# Altium PCB stm32.PcbDoc
Units mm, origin at the board's own origin, x right, y up, seen from the top; angles counter-clockwise.
Board outline 46 x 46 mm, 2 copper layers (Top Layer, Bottom Layer), stack 0.971 mm thick; 38 components, 25 nets, 183 pads, 63 vias.
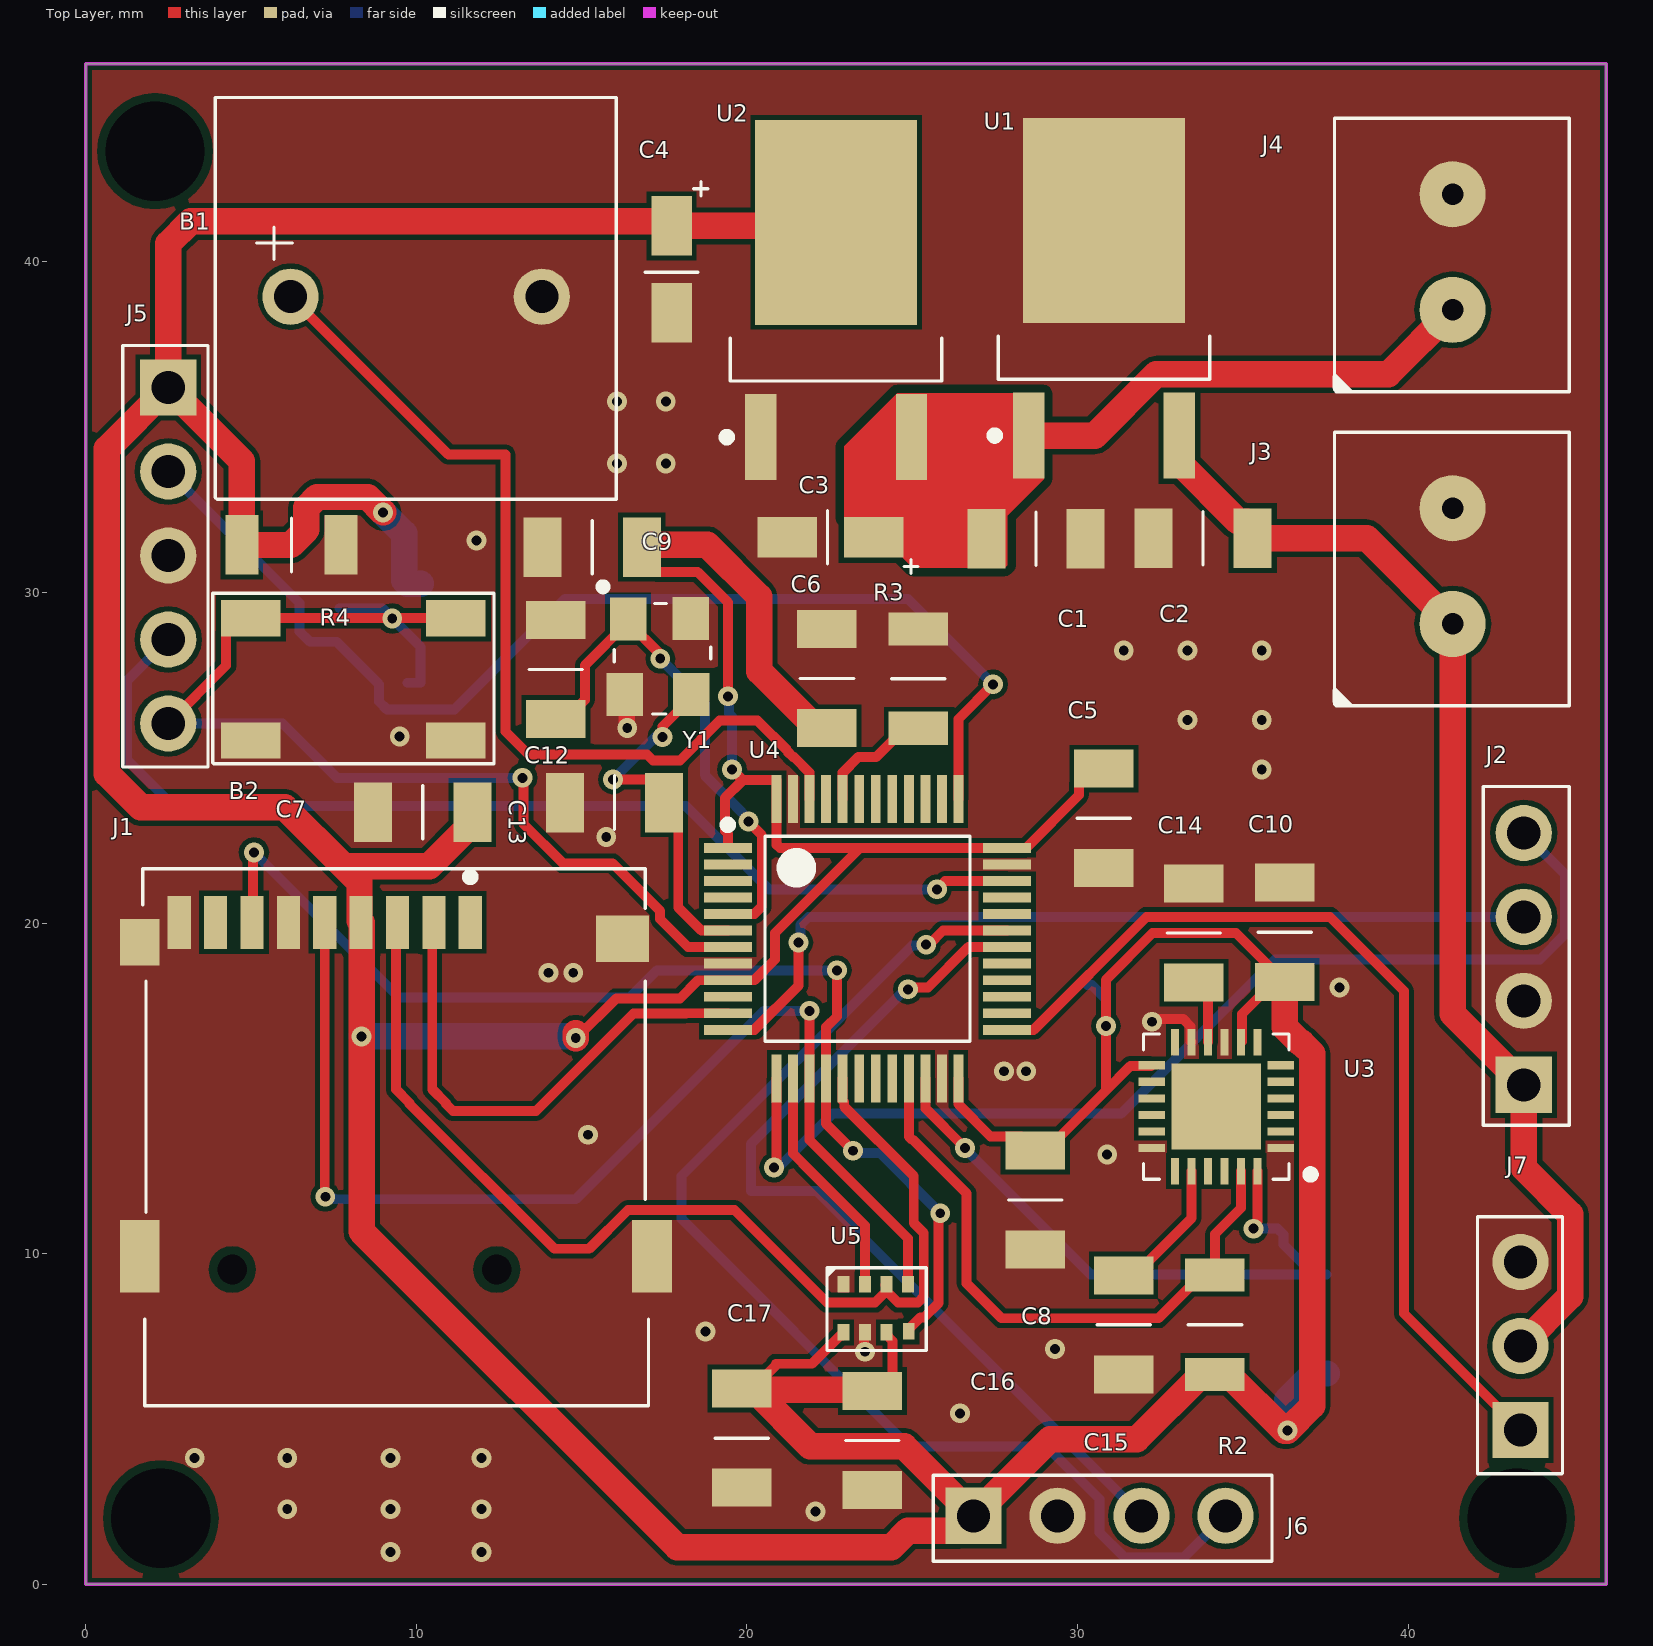
[diagram p0: Top Layer view]
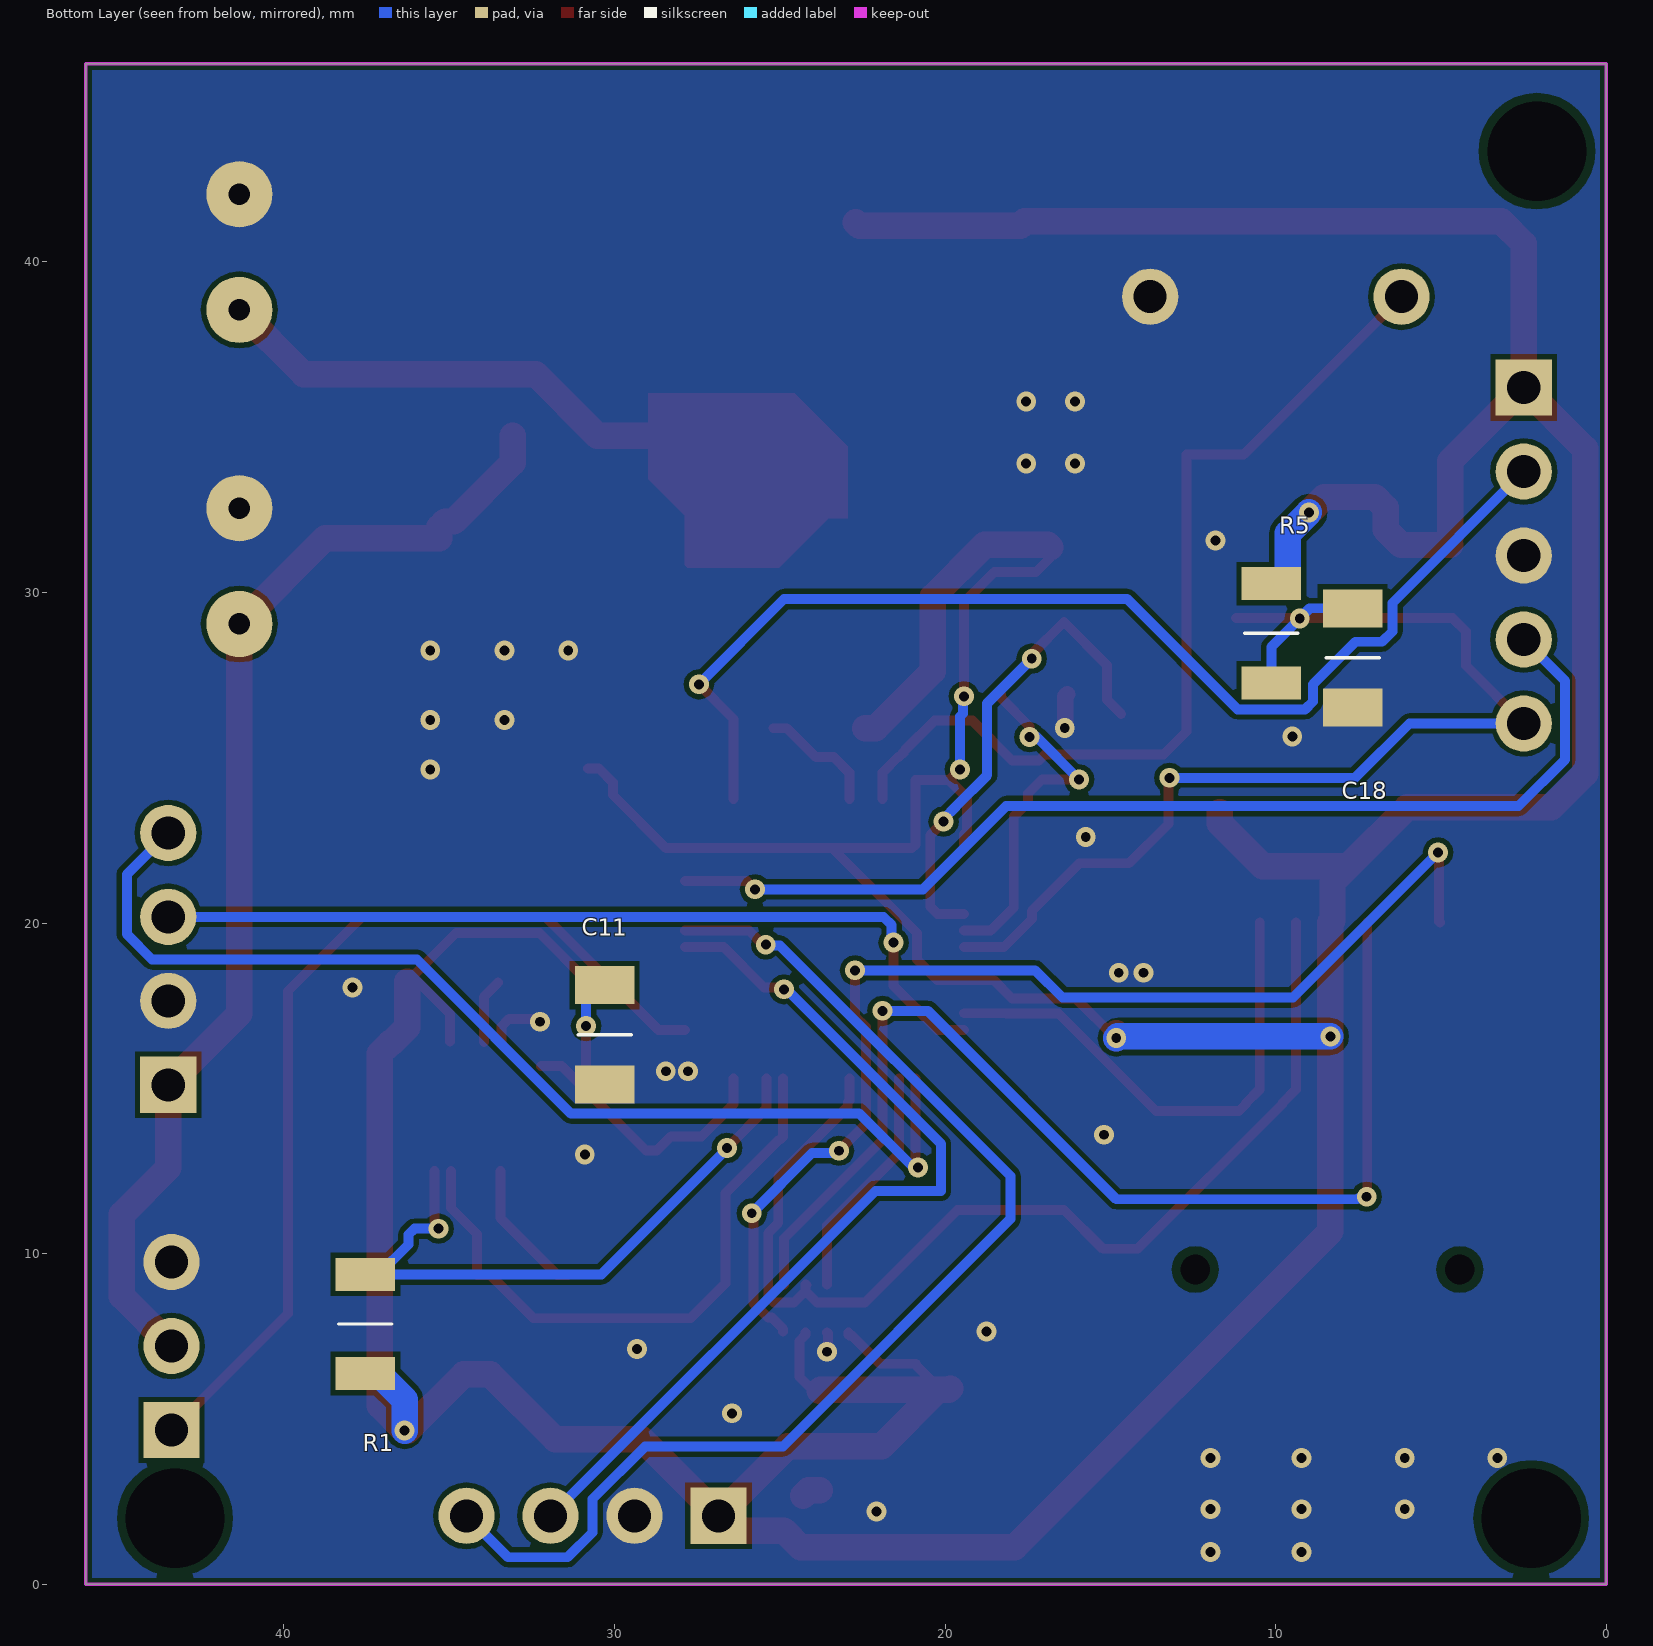
[diagram p1: Bottom Layer view, seen from below]
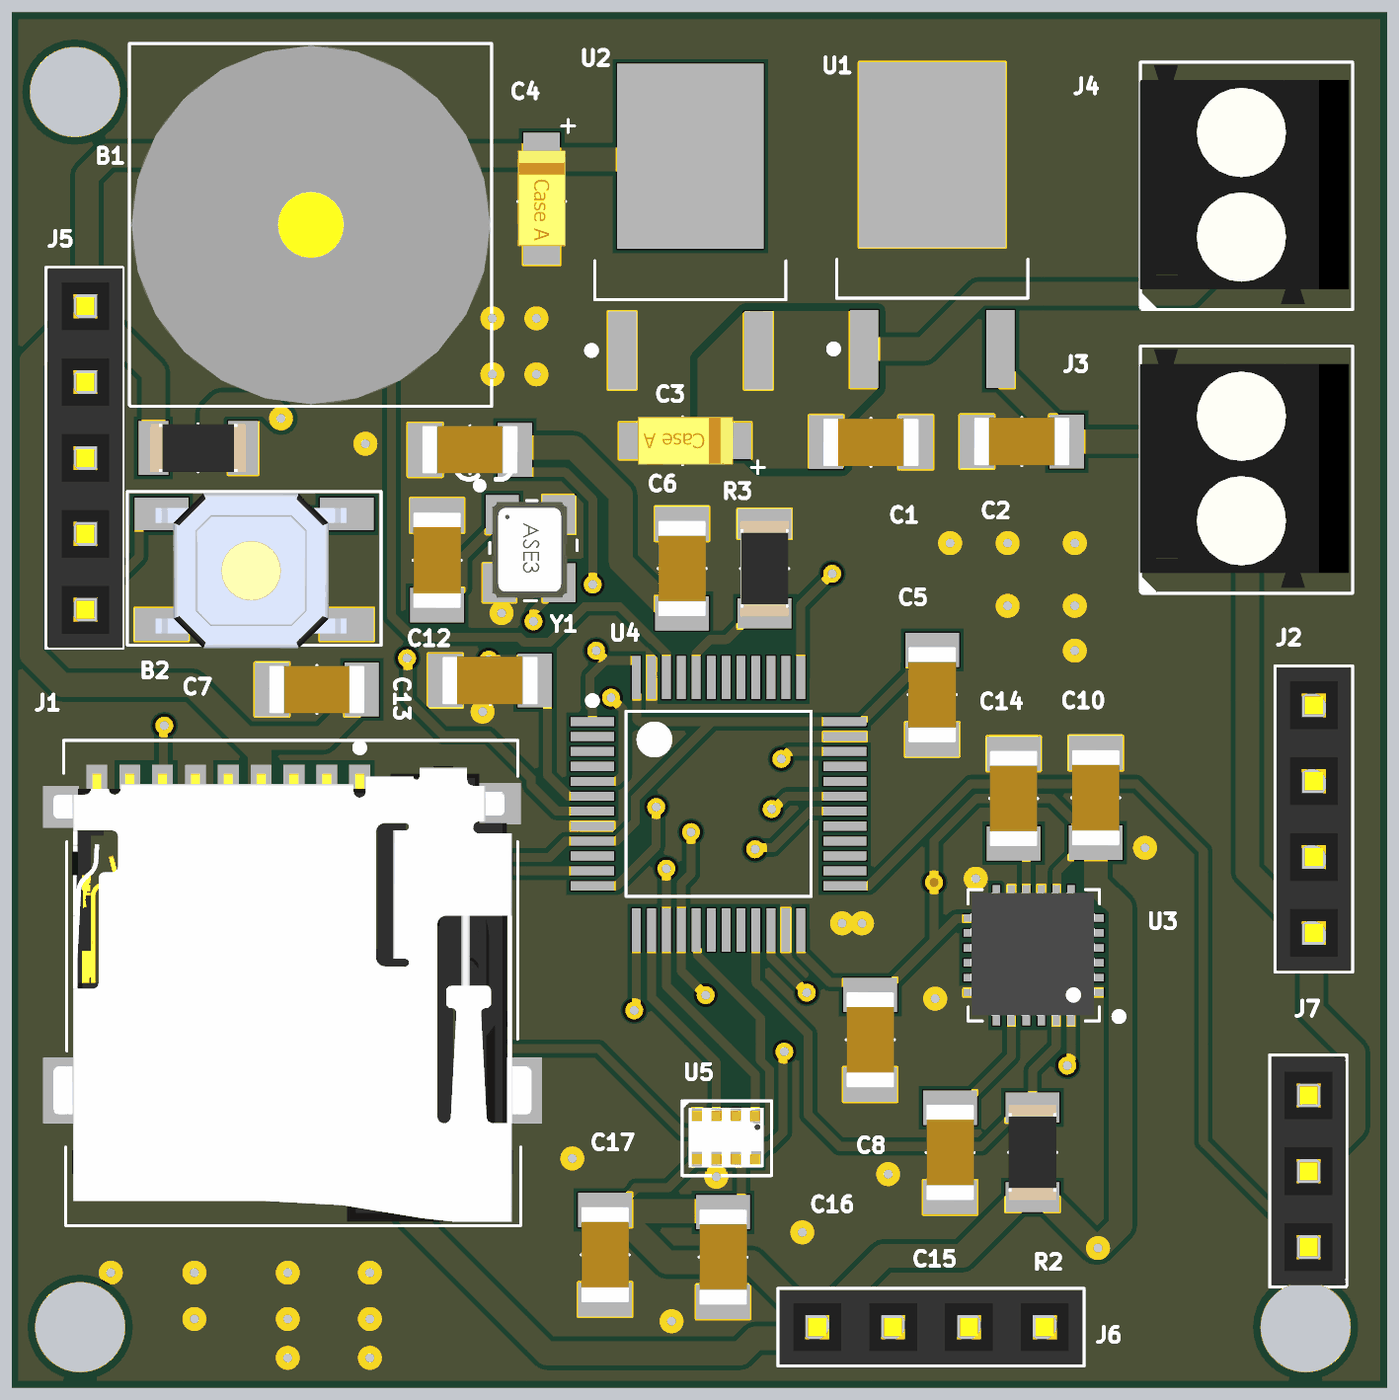
[diagram p2: 3D render of the assembled board from above, using the file's embedded part models]
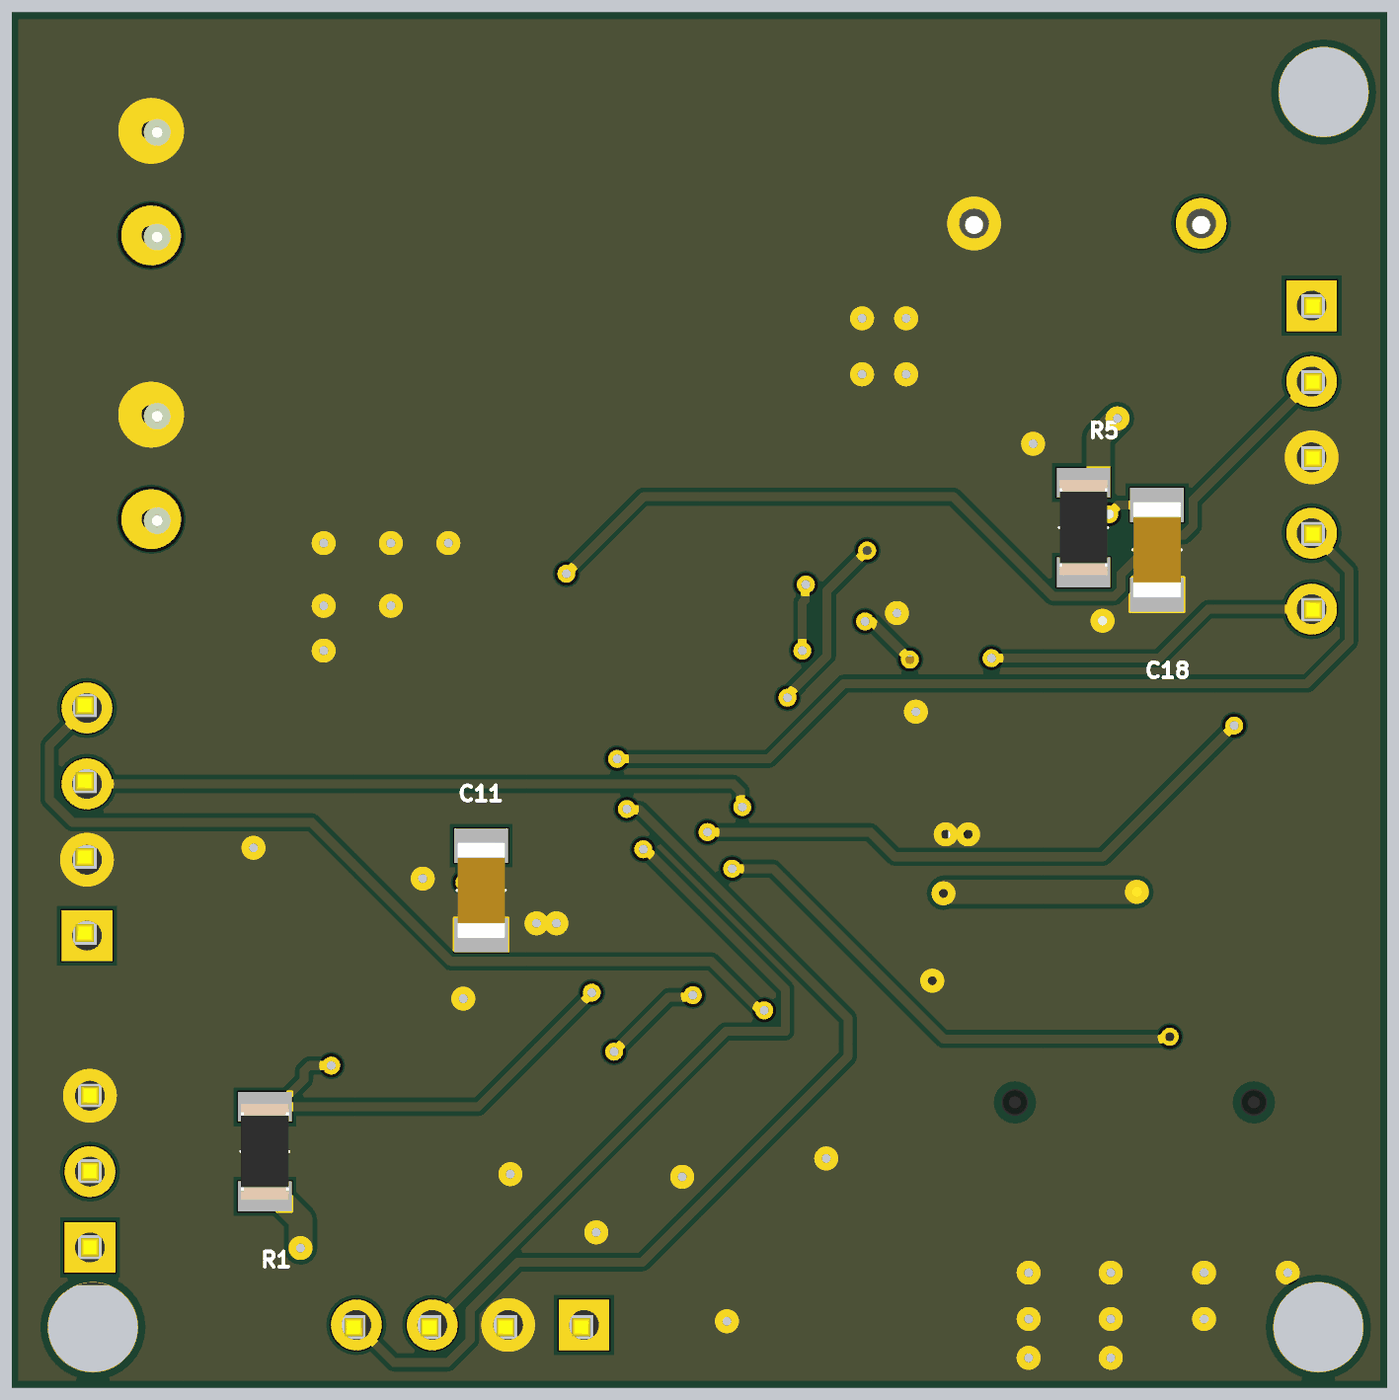
[diagram p3: 3D render of the assembled board from below, using the file's embedded part models]

## Layer stack, top to bottom
Top Solder: solder mask 0.026, Solder Resist, Dk 3.5
Top Layer: signal copper 0.0356
Dielectric 1: dielectric 0.9, FR-4, Dk 4.8
Bottom Layer: signal copper 0.0356
Bottom Solder: solder mask 0.026, Solder Resist, Dk 3.5

## Board outline
0,0 0,46 46,46 46,0

## Design rules (kind name [scope] priority, off if disabled: settings)
Clearance [All] p1: gap=0.254 ignorepadtopadclearanceinfootprint=FALSE except(0.152: Arc-Track Arc-SMDPad Arc-Poly Track-Track Track-SMDPad Track-Poly SMDPad-SMDPad SMDPad-Poly THPad-Poly Via-Poly Fill-Poly Poly-Poly)
HoleSize [All] p1: absolutevalues=TRUE maxlimit=3.1 minlimit=0.025 maxpercent=80.000 minpercent=20.000
MinimumSolderMaskSliver [All] p1: minsoldermaskwidth=0.1
PolygonConnect [All] p1: connectstyle=Direct reliefconductorwidth=0.254 reliefentries=4 polygonreliefangle="90 Angle" airgapwidth=0.254
RoutingVias [All] p1: holewidth=0.3 width=0.6 viastyle="Through Hole" minholewidth=0.2 minwidth=0.2 maxholewidth=0.9 maxwidth=1.27
SilkToSolderMaskClearance [IsPad] p1: minsilkscreentomaskgap=0.1 clearancetoexposedcopper=TRUE
SolderMaskExpansion [All] p1: expansion=0.102 istentingtop=FALSE
Width [All] p1: maxlimit=1 minlimit=0.254 preferedwidth=0.3 minimp=50.000000 maximp=50.000000 favimp=50.000000
27 further rules are at their usual default settings.

## Components (designator, comment, footprint, x,y, rotation, side; value= is the part's Value field where it differs from the comment)
B1 "Buzzer 5v" "BUZZER 5V" 10.1,38.95 r0 top
B2 "Push Button" "PUSB BUTTON-SMD" 5,29.225 r0 top
C1 "330 nF C1206" C1206 29.225,31.225 r180 top value="330 nF"
C2 "0.1 uF C1206" C1206 33.325,32.05 r0 top value="0.1 uF"
C3 "10 uF - Tantal" "C1206 - TANTAL" 23.3,31.45 r180 top value="10 uF"
C4 "10 uF - Tantal" "C1206 - TANTAL" 17.95,40.55 r270 top value="10 uF"
C5 "0.1 uF C1206" C1206 31.2,23.65 r270 top value="0.1 uF"
C6 "0.1 uF C1206" C1206 22.025,26.925 r90 top value="0.1 uF"
C7 "0.1 uF C1206" C1206 10.675,22.95 r180 top value="0.1 uF"
C8 "0.1 uF C1206" C1206 29.125,12.1 r270 top value="0.1 uF"
C9 "0.1 uF C1206" C1206 15.8,30.975 r180 top value="0.1 uF"
C10 "0.1 uF C1206" C1206 35.875,19.25 r90 top value="0.1 uF"
C11 "0.1 uF C1206" C1206 29.9,17.1 r270 bottom value="0.1 uF"
C12 "16 pF" C1206 14.625,28.15 r270 top
C13 "16 pF" C1206 15.525,24.05 r0 top
C14 "0.1 uF C1206" C1206 33.125,19.225 r90 top value="0.1 uF"
C15 "2.2 nF c1206" C1206 31.8,8.325 r270 top value="2.2 nF"
C16 "0.1 uF C1206" C1206 24.2,4.825 r270 top value="0.1 uF"
C17 "0.1 uF C1206" C1206 20.25,4.9 r270 top value="0.1 uF"
C18 "0.1 uF C1206" C1206 7.275,28.5 r270 bottom value="0.1 uF"
J1 "Micro SD Card Holder" "MICRO SD CARD HOLDER" 9.45,14.25 r0 top
J2 "Header 2.54 1x4" "Header 2.54 1x4" 43.5,15.11 r90 top
J3 "Klemens 1x2 3.5mm" "Klemens 1x2 3.5mm" 41.3,30.75 r90 top
J4 "Klemens 1x2 3.5mm" "Klemens 1x2 3.5mm" 41.3,40.25 r90 top
J5 "Header 2.54 1x5" "Header 2.54 1x5" 2.5,36.2 r270 top
J6 "Header 2.54 1x4" "Header 2.54 1x4" 26.86,2.075 r0 top
J7 "Header 2.54 1x3" "Header 2.54 1x3" 43.4,4.67 r90 top
R1 "4.7K R1206" "R1206 RESISTOR" 37.475,7.875 r270 bottom value=4.7K
R2 "4.7K R1206" "R1206 RESISTOR" 34.225,7.85 r270 top value=4.7K
R3 "10K R1206" "R1206 RESISTOR" 25.125,27.4 r90 top value=10K
R4 "10K R1206" "R1206 RESISTOR" 6.225,31.375 r180 top value=10K
R5 "10K R1206" "R1206 RESISTOR" 10.2,28.775 r90 bottom value=10K
U1 "L7805-DPAK" DPAK228P972X230-3N 30.805,38.9 r90 top
U2 "LD108633 DPAK" DPAK228P972X230-3N 22.7,38.85 r90 top
U3 "MPU6050" QFN50P400X400X90_HS-25N 34.2,14.45 r180 top
U4 "STM32F101" LQFP48-STM 23.65,19.525 r0 top
U5 "BMP280" BMP280 23.9,8.35 r0 top
Y1 "8 MHz 12.5 pf Osc" "8 MHZ Osc." 17.3,27.925 r270 top

## Footprints (in the part's own frame and the unit in brackets; to place one, negate y for a bottom-side part, rotate by r counter-clockwise, add the part's x,y. Pads: shape width x height; smd on the part's side, far side on the other; paste and mask are expansions set on the pad)
"8 MHZ Osc." [mm]
  rect 1.3x1.1 smd mask+0.05: 1(-1.281,-0.89) 2(1.003,-0.99) 3(1.003,1.017) 4(-1.286,1.001)
  silkscreen extent -2.35,-1.75 1.6,1.61, body extent -1.7,-1.23 1.5,1.27, height 1.22
BMP280 [mm]
  rect 0.35x0.5 smd mask+0.05: 1(-0.975,0.725) 2(-0.325,0.725) 3(0.325,0.725) 4(0.975,0.725) 5(1,-0.7) 6(0.325,-0.725) 7(-0.325,-0.725) 8(-0.975,-0.725)
  silkscreen extent -1.5,-1.28 1.53,1.22, body extent -1.25,-1 1.25,1, height 0.01
"BUZZER 5V" [mm]
  round 1.7 hole 1 mask+0.05: 1(-3.9,0) 2(3.7,0)
  silkscreen extent -6.18,-6.12 5.95,6.02, body extent -6.1,-6.05 5.9,5.95, height 9.5
C1206 [mm]
  rect 1.15x1.8 smd mask+0.05: 1(-1.025,-0.4) 2(1.975,-0.4)
  silkscreen extent 0.48,-1.2 0.48,0.41, body extent -1.12,-1.2 2.08,0.4, height 1
"C1206 - TANTAL" [mm]
  rect 1.8x1.23 smd mask+0.05: 1(-0.54,-0.226) 1(-0.54,-0.226) 2(2.08,-0.226)
  silkscreen extent -1.88,-1.03 0.86,0.87, body extent -0.84,-1.03 2.36,0.57, height 1.62
DPAK228P972X230-3N [mm] "D-PAK, 3-Pads, Body 6,40x6,56mm (max), IPC Medium Density"
  rect 2.6x0.95 smd mask+0.05: 1(-4.15,2.28) 2(-4.15,-2.28)
  rect 6.2x4.9 smd mask+0.05: 3(2.35,0)
  silkscreen extent -4.27,-3.2 -1.15,3.43, body extent -2.5,-3.2 4.1,3.2, height 2.3
"Header 2.54 1x3" [mm]
  rect 1.7x1.7 hole 1 mask+0.05: 1(0,0)
  round 1.7 hole 1 mask+0.05: 2(2.54,0) 3(5.08,0)
  silkscreen extent -1.33,-1.27 6.45,1.3, body extent -1.26,-1.25 6.36,1.25, height 9.1
"Header 2.54 1x4" [mm]
  rect 1.7x1.7 hole 1 mask+0.05: 1(0,0)
  round 1.7 hole 1 mask+0.05: 2(2.54,0) 3(5.08,0) 4(7.62,0)
  silkscreen extent -1.23,-1.37 9.02,1.23, body extent -1.18,-1.32 8.98,1.18, height 9.1
"Header 2.54 1x5" [mm]
  rect 1.7x1.7 hole 1 mask+0.05: 1(0,0)
  round 1.7 hole 1 mask+0.05: 2(2.54,0) 3(5.08,0) 4(7.62,0) 5(10.16,0)
  silkscreen extent -1.28,-1.37 11.48,1.2, body extent -1.25,-1.3 11.45,1.2, height 9.1
"Klemens 1x2 3.5mm" [mm]
  round 2 hole 0.65: 1(-1.7,-0.05) 2(1.8,-0.05)
  silkscreen extent -4.21,-3.58 4.1,3.58, body extent -4,-3.45 3.99,3.55, height 8.9
LQFP48-STM [mm] "TSQFP, 48-Leads, Body 7,00x7,00mm, Pitch 0,50mm, IPC Medium Density"
  rect 1.45x0.3 smd mask+0.05: 1(-4.225,2.75) 2(-4.225,2.25) 3(-4.225,1.75) 4(-4.225,1.25) 5(-4.225,0.75) 6(-4.225,0.25) 7(-4.225,-0.25) 8(-4.225,-0.75) 9(-4.225,-1.25) 10(-4.225,-1.75) 11(-4.225,-2.25) 12(-4.225,-2.75) 25(4.225,-2.75) 26(4.225,-2.25) 27(4.225,-1.75) 28(4.225,-1.25) 29(4.225,-0.75) 30(4.225,-0.25) 31(4.225,0.25) 32(4.225,0.75) 33(4.225,1.25) 34(4.225,1.75) 35(4.225,2.25) 36(4.225,2.75)
  rect 0.3x1.45 smd mask+0.05: 13(-2.75,-4.225) 14(-2.25,-4.225) 15(-1.75,-4.225) 16(-1.25,-4.225) 17(-0.75,-4.225) 18(-0.25,-4.225) 19(0.25,-4.225) 20(0.75,-4.225) 21(1.25,-4.225) 22(1.75,-4.225) 23(2.25,-4.225) 24(2.75,-4.225) 37(2.75,4.225) 38(2.25,4.225) 39(1.75,4.225) 40(1.25,4.225) 41(0.75,4.225) 42(0.25,4.225) 43(-0.25,4.225) 44(-0.75,4.225) 45(-1.25,4.225) 46(-1.75,4.225) 47(-2.25,4.225) 48(-2.75,4.225)
  silkscreen extent -4.35,-3.1 3.1,3.57, body extent -3.5,-3.5 3.5,3.5, height 1.6
"MICRO SD CARD HOLDER" [mm]
  rect 0.7x1.6 smd paste+0 mask+0: 1(2.184,5.775) 2(1.084,5.775) 3(-0.016,5.775) 4(-1.116,5.775) 5(-2.216,5.775) 6(-3.316,5.775) 7(-4.416,5.775) 8(-5.516,5.775) 9(-6.616,5.775)
  rect 1.2x1.4 smd paste+0 mask+0: 10(-7.816,5.175)
  rect 1.6x1.4 smd paste+0 mask+0: 11(6.784,5.275)
  rect 1.2x2.2 smd paste+0 mask+0: 12(-7.816,-4.325) 13(7.684,-4.325)
  round 0 hole 0.9 unplated paste-1000 mask+0: ""(-5.016,-4.725) ""(2.984,-4.725)
  silkscreen extent -7.73,-8.85 7.57,7.4, body extent -8.07,-8.72 7.93,6.53, height 1.85
"PUSB BUTTON-SMD" [mm]
  rect 1.8x1.1 smd mask+0.05: 1(0,0) 2(6.2,0) 3(0,-3.7) 4(6.2,-3.7)
  silkscreen extent -1.15,-4.4 7.35,0.75, body extent -0.2,-4.5 6.2,0.7, height 1.5
QFN50P400X400X90_HS-25N [mm] "QFN, 24-Leads, Body 4,00x4,00mm, Pitch 0,50mm, Thermal Pad 2,70x2,60mm, IPC Medium Density"
  rect 0.8x0.25 smd mask+0.05: 1(-1.95,1.25) 2(-1.95,0.75) 3(-1.95,0.25) 4(-1.95,-0.25) 5(-1.95,-0.75) 6(-1.95,-1.25) 13(1.95,-1.25) 14(1.95,-0.75) 15(1.95,-0.25) 16(1.95,0.25) 17(1.95,0.75) 18(1.95,1.25)
  rect 0.25x0.8 smd mask+0.05: 7(-1.25,-1.95) 8(-0.75,-1.95) 9(-0.25,-1.95) 10(0.25,-1.95) 11(0.75,-1.95) 12(1.25,-1.95) 19(1.25,1.95) 20(0.75,1.95) 21(0.25,1.95) 22(-0.25,1.95) 23(-0.75,1.95) 24(-1.25,1.95)
  rect 2.7x2.6 smd mask+0.05: 25(0,0)
  silkscreen extent -2.98,-2.2 2.2,2.2, body extent -2.03,-2.11 2.11,2.03, height 0.9
"R1206 RESISTOR" [mm]
  rect 1x1.8 smd mask+0.05: 1(-1.504,-0.064) 2(1.496,-0.064)
  silkscreen extent 0,-0.87 0,0.74, body extent -1.6,-0.87 1.6,0.74, height 0.55

## Part data
B1: "BUZZER MAGNETIC 5V 12MM TH", Manufacturer="CUI Devices", Operating Temperature="-30°C ~ 70°C", Part Number=102-1124-ND, Price=$1.87
B2: "Smd Push Button", Satın Alma Linki=https://urun.n11.com/diger/mini-pushbutton-switch-smd-P227461537?gclid=Cj0KCQjwkoDmBRCcARIsAG3xzl8Y_-jeD7HocNM6lvuZ_rVp83568XPGtNzlPwXWLph8oCRqo0yh87UaApZYEALw_wcB&gclsrc=aw.ds
C1: "CAP CER 0.33UF 50V X7R 1206", Manufacturer=KEMET, Operating Temperature="-55°C ~ 125°C", Part Number=399-C1206C334K5RAC7800TR-ND, Price=$0.66
C2 C5 C6 C7 C8 C9 C10 C11 C14 C16 C17 C18: "CAP CER 0.1UF 50V X7R 1206", Manufacturer=KEMET, Operating Temperature="-55°C ~ 125°C", Part Number=399-C1206C104K5RAC7800TR-ND, Price=$0.10
C3 C4: "CAP.TANTAL 10UF 20V 20% A CASE (3216)", Manufacturer=KEMET, Operating Temperature=-55°C~+125°C, Part Number=399-5152-2-ND, Price=$0.35
C12 C13: "CAP CER 16PF 50V NP0 1206", Manufacturer=KEMET, Operating Temperature="-55°C ~ 125°C", Part Number=399-17465-2-ND, Price=$0.41
C15: "CAP CER 2200PF 50V C0G/NP0 1206", Manufacturer=KEMET, Operating Temperature=399-C1206C222G5GAC7800TR-ND, Part Number="-55°C ~ 125°C", Price=$1.06
J1: "CONNECTOR MICRO SD CARD SMD KLS", Manufacturer="KLS ELECTRONIC", Operating Temperature=-25°C~+90°C, Part Number=KLS1-TF-003, Price=$0.30
J5: "FEMALE HEADER 5PIN(1x5) 2.54mm THT V/T TRAY", Manufacturer="KLS ELECTRONIC", Operating Temperature=-45°C~+105°C, Part Number=KLS1-208-1-05-S, Price=$0.04
R1 R2: "CPF 1206 4R64 0.1% 25PPM 1K RL", Manufacturer="TE Connectivity Passive Product", Operating Temperature="-55°C ~ 155°C", Part Number="1712-CPF1206B4R64E1TR-ND - Tape & Reel (TR)", Price=$0.78
R3: "RQ 0805 10R 0.1% 10PPM 1K RL", Manufacturer="TE Connectivity Passive Product", Operating Temperature="1712-RQ73C2A10RBTDFTR-ND - Tape & Reel (TR)", Part Number="-55°C ~ 155°C", Price=$1.14
R4 R5: "RQ 0805 10R 0.1% 10PPM 1K RL", Manufacturer="TE Connectivity Passive Product", Operating Temperature="-55°C ~ 155°C", Part Number="1712-RQ73C2A10RBTDFTR-ND - Tape & Reel (TR)", Price=$1.14
U1: "IC REG LINEAR 5V 1.5A DPAK", Manufacturer=STMicroelectronics, Operating Temperature="0°C ~ 125°C", Part Number=497-7255-2-ND, Price=$1.20
U2: "IC REG LINEAR 3.3V 1.5A DPAK", Manufacturer=STMicroelectronics, Operating Temperature=-40°C~+125°C, Part Number=497-3446-2-ND, Price=$1.59
U3: "IMU ACCEL/GYRO 3-AXIS I2C 24QFN", Manufacturer="TDK InvenSense", Operating Temperature="-40°C ~ 85°C (TA)", Part Number=1428-1007-2-ND, Price=$9.11
U4: "IC MCU 32BIT 64KB FLASH 48LQFP", Manufacturer=STMicroelectronics, Operating Temperature="-40°C ~ 85°C (TA)", Part Number=497-6063-ND, Price=$7.64
U5: "SENSOR PRESSURE ABS", Manufacturer="Bosch Sensortec", Operating Temperature="-40°C ~ 85°C", Part Number=828-1064-2-ND, Price=$3.74
Y1: "CRYSTAL 8MHZ 12.5pF SMD TR RALTRON", Manufacturer=RALTRON, Operating Temperature=-40°C~+85°C, Part Number=RH100-8.000-12.5-20150-E, Price=$0.56

## Free pads (board coordinates)
  rect 0x0 hole 3: 2(2.1,43.35) 2(2.275,2) 2(43.3,2)

## Via types
v1: diameter 0.6, hole 0.3, Top Layer to Bottom Layer, 63 vias

## Nets (pads, with @x,y where several pads share a name; then routed paths per layer and width w, separated by ;. In a path a pad name is that pad's centre, name@x,y a point inside that pad or via, vN(x,y) a via of type N, cw(c..) or ccw(c..) an arc to the next point about the centre after c; other vN are vias at no path point)
3.3V: C4.1 C5.1 C6.1 C7.1 C8.1 C9.1 C10.1 C11.1 C16.1 C17.1 J1.4 J5.1 J6.1 R1.2 R2.2 R4.2 R5.2 U2.3 U3.8 U3.13 U4.1 U4.9 U4.24 U4.36 U4.48 U5.6 U5.8 | length 220.1
  Top Layer w0.3: v1(14.825,16.525) 14.85,16.525 16.05,17.725 17.975,17.725 18.525,18.275 U4.9 20.227,18.275 20.856,18.904 20.856,19.706 23.425,22.275 ; C9.1 16.825,31.05 17.25,30.625 18.514,30.625 19.433,29.706 v1(19.433,26.862) ; U4.1 19.425,22.7 19.342,22.783 19.342,23.792 19.875,24.325 ; v1(19.55,24.65) 19.875,24.325 ; C17.1@20.175,5.925 20.875,6.625 20.875,6.675 21.975,6.675 22.825,7.525 22.9,7.525 22.925,7.55 U5.8 ; U4.48@20.9,23.175 U4.48 20.9,24.325 19.875,24.325 ; U4.48@20.904,23.175 20.904,22.371 21,22.275 23.425,22.275 ; C16.1 23.984,5.85 24.409,6.275 24.409,7.366 24.225,7.55 U5.6 ; U4.24 26.4,14.525 27.375,13.55 28.3,13.55 C8.1 29.05,13.125 30.861,14.936 ; C5.1 30.475,24.675 30.05,24.25 30.05,23.875 28.45,22.275 U4.36 23.425,22.275 ; U3.13@32.225,15.675 31.6,15.675 30.861,14.936 ; U3.8@34.975,16.425 34.975,17.25 35.95,18.225 C10.1 34.8,19.7 32.273,19.7 30.861,18.288 v1(30.861,16.891) 30.861,14.936
  Top Layer w0.8: R4.2 6.208,31.439 6.677,31.908 6.677,32.568 7,32.891 8.534,32.891 v1(9,32.425) ; R4.2@4.729,31.655 4.729,33.971 J5.1 ; C7.1 11.7,23.025 10.4,21.725 7.8,21.725 ; v1(14.825,16.525) v1@14.825,16.675 ; C9.1 16.9,31.45 18.8,31.45 20.375,29.875 20.375,27.625 22.1,25.9 C6.1 ; C17.1 19.888,5.888 C17.1@20.213,5.888 ; U2.3 22.59,41.09 17.724,41.09 17.589,41.225 3.175,41.225 2.5,40.55 J5.1 ; C16.1 23.763,5.888 C17.1@20.213,5.888 ; C10.1 36.275,16.846 36.744,16.377 36.779,16.377 37.102,16.054 37.102,5.402 v1(36.35,4.65) 36.265,4.65 34.561,6.354 R2.2 33.761,6.354 31.796,4.389 29.174,4.389 J6.1 ; J5.1 0.646,34.346 0.646,24.525 1.671,23.5 6.025,23.5 7.8,21.725 ; 7.8,21.725 8.284,21.241 8.284,20.075 J1.4 8.35,20.009 v1(8.35,16.575) 8.35,10.675 17.9,1.125 24.375,1.125 24.875,1.625 26.41,1.625 J6.1 ; C17.1@20.213,5.888 21.925,4.175 24.76,4.175 J6.1
  Bottom Layer w0.3: v1(19.433,26.862) 19.457,26.838 19.457,26.343 19.55,26.25 v1(19.55,24.65) ; C11.1 30.436,18.125 30.861,17.7 v1(30.861,16.891)
  Bottom Layer w0.8: v1(8.35,16.575) 14.775,16.575 v1(14.825,16.525) ; v1(9,32.425) 9.636,31.789 9.636,30.371 9.736,30.271 R5.2 ; v1(36.35,4.65) 36.35,5.59 37.139,6.379 R1.2
5V: C2.2 J2.1 J3.1 J7.2 U1.2 | length 35.2
  Top Layer w0.8: U1.2 33.085,33.925 34.86,32.15 35.125,32.15 35.3,31.975 C2.2 38.75,31.65 J3.1 41.35,17.26 J2.1 43.5,12.596 44.904,11.192 44.904,8.714 J7.2
7.4V: C1.2 C3.1 J4.1 U1.1 U2.2 | length 14.4
  Top Layer w0.8: U1.1 30.529,34.75 32.381,36.602 39.402,36.602 J4.1
GND: B1.2 B2.3 B2.4 C1.1 C2.1 C3.2 C4.2 C5.2 C6.2 C7.2 C8.2 C9.2 C10.2 C11.2 C12.1 C13.1 C14.2 C15.2 C16.2 C17.2 C18.2 J1.6 J1.9 J1.10 J1.11 J1.12 J1.13 J2.2 J3.2 J4.2 J5.3 J6.2 J7.3 R3.2 R4.1 U1.3 U2.1 U3.1 U3.9 U3.11 U3.18 U4.8 U4.23 U4.35 U4.47 U5.1 U5.7 Y1.2 Y1.4 | length 4.1
  Top Layer w0.3: v1(23.571,7.036) 23.554,7.036 23.55,7.04 23.55,7.6 U5.7 ; v1(32.258,17.018) 32.339,17.018 32.423,17.102 33.2,17.102 33.425,16.877 33.425,16.425 U3.11
  Top Layer w0.5: Y1.2 16.364,26.868 16.364,25.927 v1(16.383,25.908)
  Top Layer w0.8: C16.2 24.125,2.85 C16.2@24.3,2.675 ; J6.2@29.4,1.99 J6.2
  other v1: 9.225,0.975 11.975,0.975 22.075,2.2 6.1,2.275 9.225,2.275 11.975,2.275 3.3,3.825 6.1,3.825 9.225,3.825 11.975,3.825 26.45,5.175 29.325,7.125 18.75,7.65 30.9,13 15.2,13.6 27.784,15.522 28.45,15.522 37.925,18.05 14,18.5 14.75,18.5 15.748,22.606 35.575,24.65 9.5,25.65 33.325,26.15 35.575,26.15 31.4,28.25 33.325,28.25 35.575,28.25 11.825,31.575 16.075,33.9 17.55,33.9 16.075,35.775 17.55,35.775
NetB1_1: B1.1 U4.46 | length 28.4
  Top Layer w0.3: B1.1 10.971,34.179 12.698,34.179 12.698,25.799 13.397,25.101 16.982,25.101 17.158,24.925 17.975,24.925 19.175,26.125 20.327,26.125 21.223,25.229 21.223,25.2 21.4,25.023 21.429,25.023 21.9,24.552 U4.46
NetC12_2: C12.2 U4.5 Y1.1 | length 14.9
  Top Layer w0.3: C12.2@14.675,26.325 15.1,26.75 15.1,27.796 16.41,29.106 17.382,28.134 v1(17.382,28) ; U4.5 20.227,20.275 20.452,20.5 20.452,22.671 20.048,23.075 v1(20.046,23.075)
  Bottom Layer w0.3: v1(17.382,28) 18.729,26.653 18.729,24.475 19.663,23.541 19.663,23.539 20.046,23.156 v1(20.046,23.075)
NetC13_2: C13.2 U4.6 Y1.3 | length 10.8
  Top Layer w0.3: v1(15.95,24.35) 17.075,24.35 17.5,23.925 C13.2 17.925,23.225 17.925,20.473 18.623,19.775 U4.6 ; v1(17.45,25.629) 17.45,25.954 18.317,26.822 Y1.3
  Bottom Layer w0.3: v1(15.95,24.35) 17.229,25.629 v1(17.45,25.629)
NetC14_1: C14.1 U3.10 | length 2
  Top Layer w0.3: C14.1 33.95,17.775 U3.10
NetC15_1: C15.1 U3.20 | length 4.2
  Top Layer w0.3: C15.1 31.725,9.35 33.45,11.075 U3.20
NetJ1_2: J1.2 U4.11 | length 15.5
  Top Layer w0.3: J1.2@10.484,20.025 10.484,14.975 10.897,14.562 10.897,14.535 11.109,14.323 13.619,14.323 16.569,17.273 18.162,17.273 18.164,17.275 U4.11
NetJ1_3: J1.3 U4.17 U5.3 | length 32.9
  Top Layer w0.3: J1.3@9.384,20.025 9.384,14.975 9.797,14.562 9.797,14.535 14.18,10.152 15.234,10.152 16.409,11.327 19.625,11.327 22.429,8.523 23.875,8.523 U5.3@24.225,8.873 ; U4.17 22.9,14.637 22.948,14.589 22.948,14.45 25.05,12.348 25.05,10.927 25.352,10.625 25.352,8.7 25.175,8.523 24.575,8.523 U5.3@24.225,8.873 ; U5.3@24.2,9.05 U5.3 U5.3@24.225,8.873
NetJ1_5: J1.5 U4.15 U5.4 | length 34.9
  Top Layer w0.3: J1.5 7.234,11.741 v1(7.25,11.725) ; v1(21.9,17.35) U4.15 21.9,13.438 24.875,10.463 U5.4
  Bottom Layer w0.3: v1(7.25,11.725) 7.307,11.668 7.52,11.668 7.537,11.65 14.825,11.65 20.525,17.35 v1(21.9,17.35)
NetJ1_7: J1.7 U4.16 U5.5 | length 35.3
  Top Layer w0.3: J1.7 5.062,20.054 5.062,22.114 v1(5.091,22.142) ; v1(22.725,18.575) 22.725,17.179 22.4,16.854 U4.16 22.4,13.933 v1(23.217,13.117) ; U5.5 24.9,7.725 25.246,8.071 25.362,8.071 25.804,8.513 25.804,11.179 v1(25.85,11.225)
  Bottom Layer w0.3: v1(5.091,22.142) 9.483,17.75 16.453,17.75 17.278,18.575 v1(22.725,18.575) ; v1(23.217,13.117) 23.298,13.117 23.364,13.05 24.025,13.05 v1(25.85,11.225) v1@25.85,11.25
NetJ2_3: J2.3 U4.12 | length 26.5
  Top Layer w0.3: U4.12 20.227,16.775 21.56,18.108 v1(21.56,19.415)
  Bottom Layer w0.3: v1(21.56,19.415) 21.618,19.472 21.618,19.943 21.865,20.19 J2.3
NetJ2_4: J2.4 U4.13 | length 33.2
  Top Layer w0.3: v1(20.825,12.608) 20.9,12.683 U4.13
  Bottom Layer w0.3: v1(20.825,12.608) 20.958,12.608 22.598,14.248 31.325,14.248 35.981,18.904 43.987,18.904 44.754,19.671 44.754,21.476 J2.4
NetJ5_2: J5.2 U4.37 | length 35.1
  Top Layer w0.3: U4.37 26.4,26.175 v1(27.45,27.225)
  Bottom Layer w0.3: J5.2 6.473,29.687 6.473,28.825 6.785,28.513 7.589,28.513 8.877,27.225 8.877,26.703 9.111,26.469 11.161,26.469 14.494,29.802 24.873,29.802 v1(27.45,27.225)
NetJ5_4: J5.4 U4.34 | length 32.5
  Top Layer w0.3: v1(25.75,21.025) 26,21.275 U4.34
  Bottom Layer w0.3: J5.4 1.246,27.326 1.246,24.954 2.654,23.546 18.154,23.546 20.675,21.025 v1(25.75,21.025)
NetJ6_3: J6.3 U4.30 | length 27.5
  Top Layer w0.3: v1(24.875,18) 24.932,18.057 25.482,18.057 26.7,19.275 U4.30
  Bottom Layer w0.3: v1(24.875,18) 24.8,18 20.121,13.321 20.121,11.904 22.111,11.904 J6.3
NetJ6_4: J6.4 U4.31 | length 36
  Top Layer w0.3: v1(25.425,19.35) 25.506,19.35 25.931,19.775 U4.31
  Bottom Layer w0.3: v1(25.425,19.35) 25.395,19.32 24.995,19.32 18.025,12.35 18.025,11.058 24.908,4.175 29.073,4.175 30.67,2.578 30.67,1.572 31.421,0.821 33.226,0.821 J6.4
NetJ7_1: J7.1 U4.25 | length 29.1
  Top Layer w0.3: U4.25 28.677,16.775 32.092,20.19 37.635,20.19 39.875,17.95 39.875,8.195 J7.1
NetR1_1: R1.1 U3.24 U4.22 | length 19.5
  Top Layer w0.3: U4.22 25.4,14.4 v1(26.6,13.2) ; v1(35.321,10.759) 35.321,10.841 35.45,10.97 U3.24
  Bottom Layer w0.3: v1(26.6,13.2) 26.6,13.175 30.396,9.379 R1.1@37.139,9.379 ; v1(35.321,10.759) 36.057,10.759 36.232,10.584 36.232,10.286 R1.1@37.139,9.379 ; R1.1 R1.1@37.139,9.379
NetR2_1: R2.1 U3.23 U4.21 | length 18.9
  Top Layer w0.3: U4.21 24.9,13.551 25.001,13.45 25.025,13.45 26.65,11.825 26.65,9.1 27.7,8.05 32.457,8.05 33.761,9.354 R2.1 34.161,10.595 34.95,11.384 U3.23
NetR3_1: R3.1 U4.44 | length 3.6
  Top Layer w0.3: U4.44 22.9,24.552 23.371,25.023 23.916,25.023 24.789,25.896 R3.1
NetU4_14: U4.14 U5.2 | length 7.1
  Top Layer w0.3: U4.14 21.4,13.035 21.704,12.731 21.704,12.721 23.575,10.85 U5.2
NRST: B2.1 B2.2 C18.1 J5.5 R5.1 U4.7 | length 36.1
  Top Layer w0.3: J5.5@2.879,26.04 J5.5 4.25,27.79 4.25,28.825 4.65,29.225 B2.1 B2.2 ; v1(13.217,24.397) 13.25,24.364 13.25,22.998 14.435,21.812 15.938,21.812 17.375,20.375 17.375,20.125 18.225,19.275 U4.7
  Bottom Layer w0.3: J5.5 5.96,26.04 7.603,24.397 v1(13.217,24.397) ; C18.1 8.975,29.525 9.25,29.25 9.25,29.242 v1(9.275,29.217) 10.136,28.356 R5.1 R5.1@9.736,27.271
pads on no net: J1. J1.1 J1.8 U3.2 U3.3 U3.4 U3.5 U3.6 U3.7 U3.12 U3.14 U3.15 U3.16 U3.17 U3.19 U3.21 U3.22 U3.25 U4.2 U4.3 U4.4 U4.10 U4.18 U4.19 U4.20 U4.26 U4.27 U4.28 U4.29 U4.32 U4.33 U4.38 U4.39 U4.40 U4.41 U4.42 U4.43 U4.45

## Polygon pours and split planes (outlines as drawn)
GND on Top Layer "GND_L01_P000" (solid, pour order 0): 0,46 46,46 46,0 0,0
GND on Bottom Layer "GND_L02_P001" (solid, pour order 1): 0.052,45.829 46.052,45.829 46.052,-0.171 0.052,-0.171

## Keep-outs
Keep-Out Layer:
  the board outline again, w0.1

## Other copper
Top Layer:
  region net 7.4V: 22.95,34.425 22.95,32.25 23.525,32.25 25.025,30.75 27.8,30.75 27.875,30.825 27.875,32.325 28.975,33.425 28.975,36.025 24.55,36.025

## Silkscreen, mask and mechanical layers (free items; w line width, h text height)
Mechanical 1:
  the board outline again, w0.1